# EAGLE board Board_file (EAGLE 9.6.2)
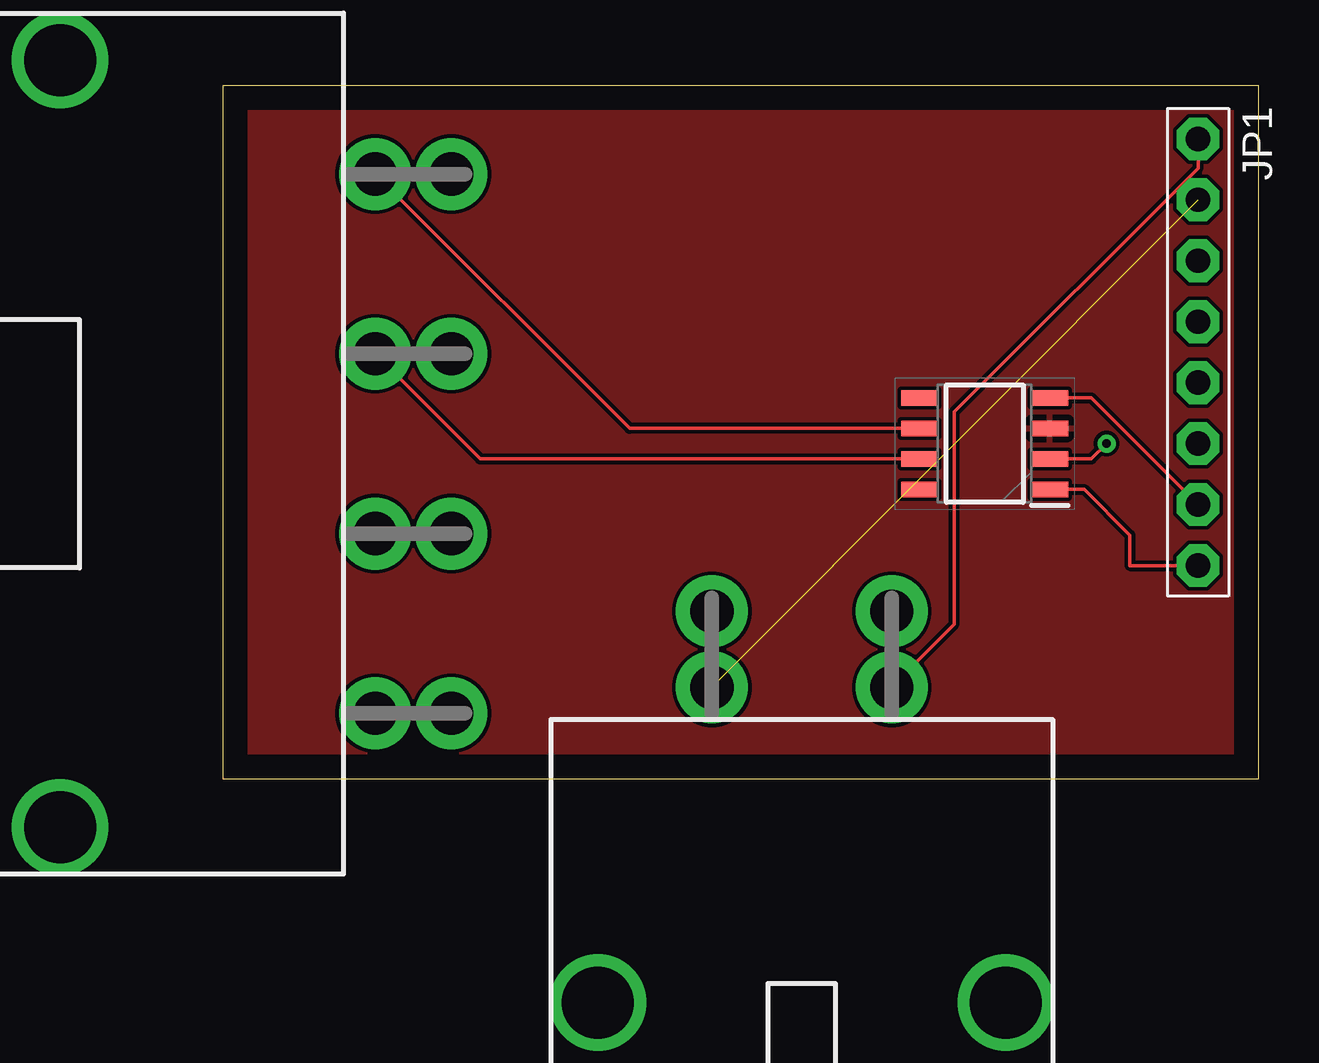
[diagram p0: board, top side]
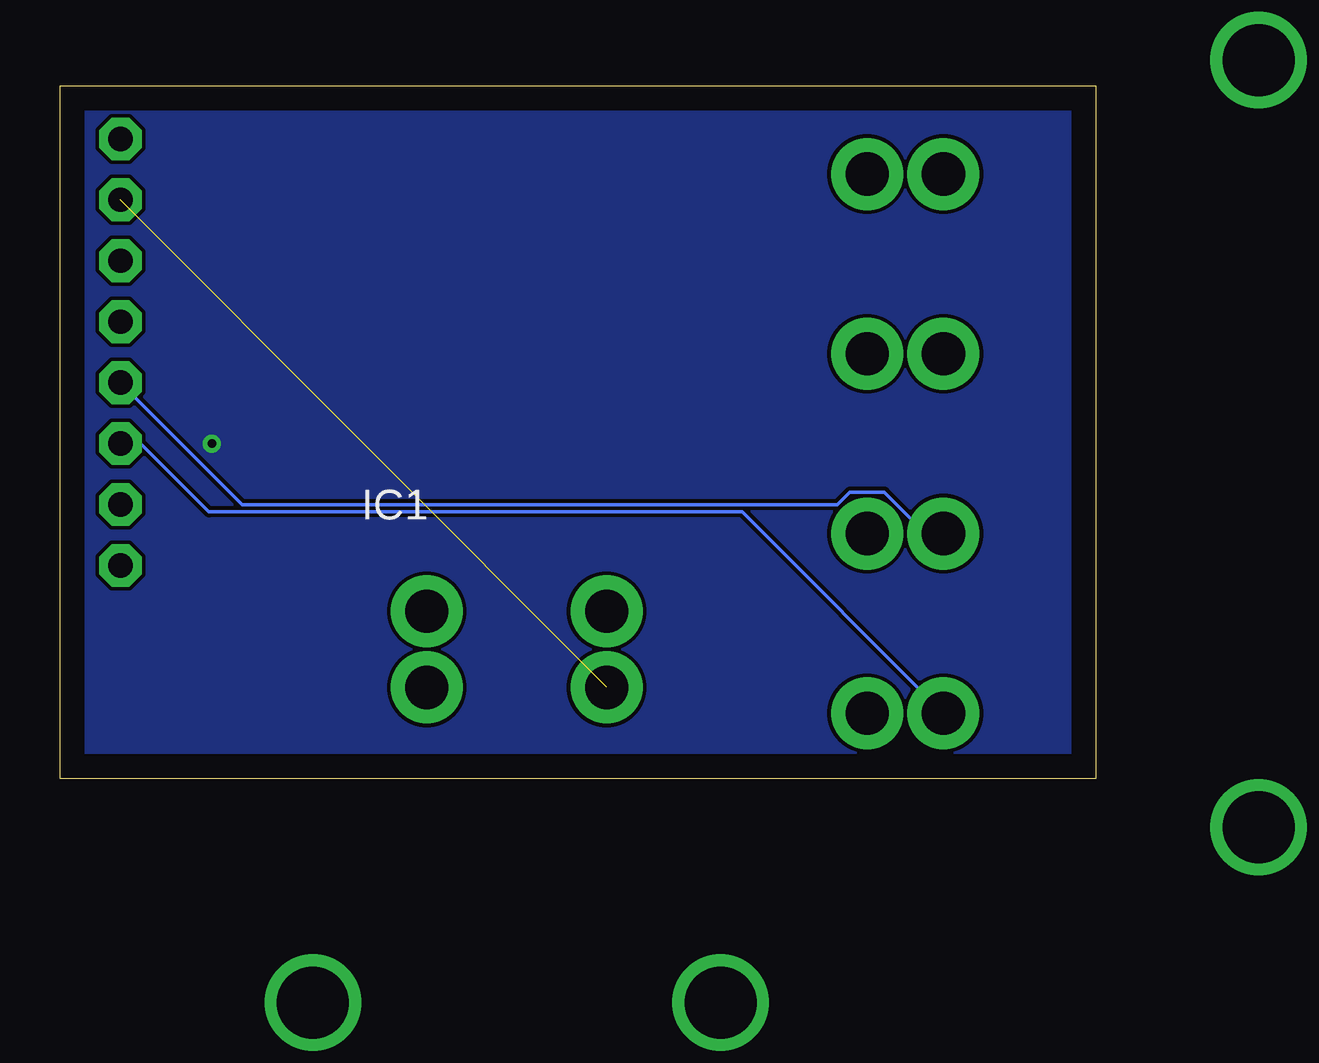
[diagram p1: board, bottom side, seen from below]

Size 43.16 x 28.88 mm. Coordinates in mm from the lower left corner, seen from the top.
Outline: 0,0 43.16,0 43.16,28.88 0,28.88 0,0
Copper layers (1*16): Top 0.035mm / dielectric 1.5mm / Bottom 0.035mm
Design rules "default": minimum track width 6mil, minimum drill 0.35mm, track to track 6mil, track to pad 6mil, pad to pad 6mil, via to via 6mil, smd to smd 6mil, copper to edge 40mil, drill to drill 6mil, minimum pad ring 10mil, minimum via ring 8mil, stop-mask expansion 4mil, vias tented up to drill 0mil, thermal gap 10mil

## Footprints (pad centres in the part's own frame; a part is rotated, then mirrored left to right if it is on the bottom)
SOIC127P600X175-8N = smd 1.528 x 0.65: 1 -2.711,1.905; 2 -2.711,0.635; 3 -2.711,-0.635; 4 -2.711,-1.905; 5 2.711,-1.905; 6 2.711,-0.635; 7 2.711,0.635; 8 2.711,1.905
1X08-BIG = drill 1.016 pad 1.778 octagon: 1 -8.89,0; 2 -6.35,0; 3 -3.81,0; 4 -1.27,0; 5 1.27,0; 6 3.81,0; 7 6.35,0; 8 8.89,0
43160-XX02 = drill 1.8 pad 3: 1@1 -3.745,0; 1@2 -3.745,3.18; 2@1 3.745,0; 2@2 3.745,3.18 | drill 3 pad 3.4: M1 -8.495,-13.13; M2 8.495,-13.13
43160-XX04 = drill 1.8 pad 3: 1@1 -11.235,0; 1@2 -11.235,3.18; 2@1 -3.745,0; 2@2 -3.745,3.18; 3@1 3.745,0; 3@2 3.745,3.18; 4@1 11.235,0; 4@2 11.235,3.18 | drill 3 pad 3.4: M1 -15.985,-13.13; M2 15.985,-13.13

## Placement (x,y rotation side)
IC1  SN65HVD231D  [SOIC127P600X175-8N]  31.75,13.97 180 top
JP1  [1X08-BIG]  40.64,17.78 270 top
X3  43160-5302  [43160-XX02]  24.13,3.81 0 top
X4  43160-5304  [43160-XX04]  6.35,13.97 270 top

## Library data of the parts
IC1 = SN65HVD231D; ARROW_PART_NUMBER: SN65HVD231D; ARROW_PRICE-STOCK: https://www.arrow.com/en/products/sn65hvd231d/texas-instruments?region=nac; DESCRIPTION: CAN Transceiver 1Mbit/s ISO 11898, Sleep-Mode, 8-Pin SOIC; HEIGHT: 1.75mm; MANUFACTURER_NAME: Texas Instruments; MANUFACTURER_PART_NUMBER: SN65HVD231D; MOUSER_PART_NUMBER: 595-SN65HVD231D; MOUSER_PRICE-STOCK: https://www.mouser.co.uk/ProductDetail/Texas-Instruments/SN65HVD231D?qs=QViXGNcIEAsYeC9x726Emw%3D%3D
JP1 = adafruit
X3 = con-molex; MF: MOLEX; MPN: 43160-5302; OC_FARNELL: unknown; OC_NEWARK: 92M1498
X4 = con-molex; MF: MOLEX; MPN: 43160-5304; OC_FARNELL: unknown; OC_NEWARK: 92M1500

## Nets
GND: IC1.2
N$1: IC1.1 JP1.8
N$2: IC1.4 JP1.7
N$3: IC1.7 X4.2@1
N$4: IC1.6 X4.1@1
N$5: JP1.5 X4.3@1
N$6: JP1.6 X4.4@1
N$7: JP1.2 X3.1@1
N$8: JP1.1 X3.2@1
VCC: IC1.3

## Tracks (layer width: path | path; a pad name or v marks a point on that pad's centre or on a via)
GND  (via drill 0.35)
  Top 0.152: IC1.2 36.2,13.33 v36.83,13.97
  pour Bottom: -1.27,29.21 -1.27,0 0,-1.27 44.45,-1.27 44.45,30.48 0,30.48
N$1
  Top 0.152: IC1.1 35.89,12.06 37.8,10.16 37.8,8.89 JP1.8
N$2
  Top 0.152: IC1.4 36.2,15.88 JP1.7
N$3
  Top 0.152: X4.2@1 10.73,13.33 IC1.7
N$4
  Top 0.152: IC1.6 16.95,14.6 X4.1@1
N$5
  Bottom 0.152: X4.3@1 7.09,10.22 8.81,11.95 10.25,11.95 10.77,11.43 35.56,11.43 JP1.5
N$6
  Bottom 0.152: X4.4@1 14.74,11.13 36.96,11.13 39.8,13.97 JP1.6
N$7  (1 unrouted)
N$8
  Top 0.152: JP1.1 40.64,25.45 30.48,15.29 30.48,6.45 27.89,3.86 X3.2@1
VCC
  pour Top: -1.27,29.21 -1.27,-1.27 44.45,-1.27 44.45,29.21 43.18,30.48 -1.27,30.48